# Altium PCB PCB_1192025.PcbDoc
Units mil, origin at the board's own origin, x right, y up, seen from the top; angles counter-clockwise.
Board outline 4125 x 3230 mil, 2 copper layers (Top Layer, Bottom Layer); 14 components, 21 nets, 83 pads, 0 vias.
Unrouted connection lines stored in the file: 4.
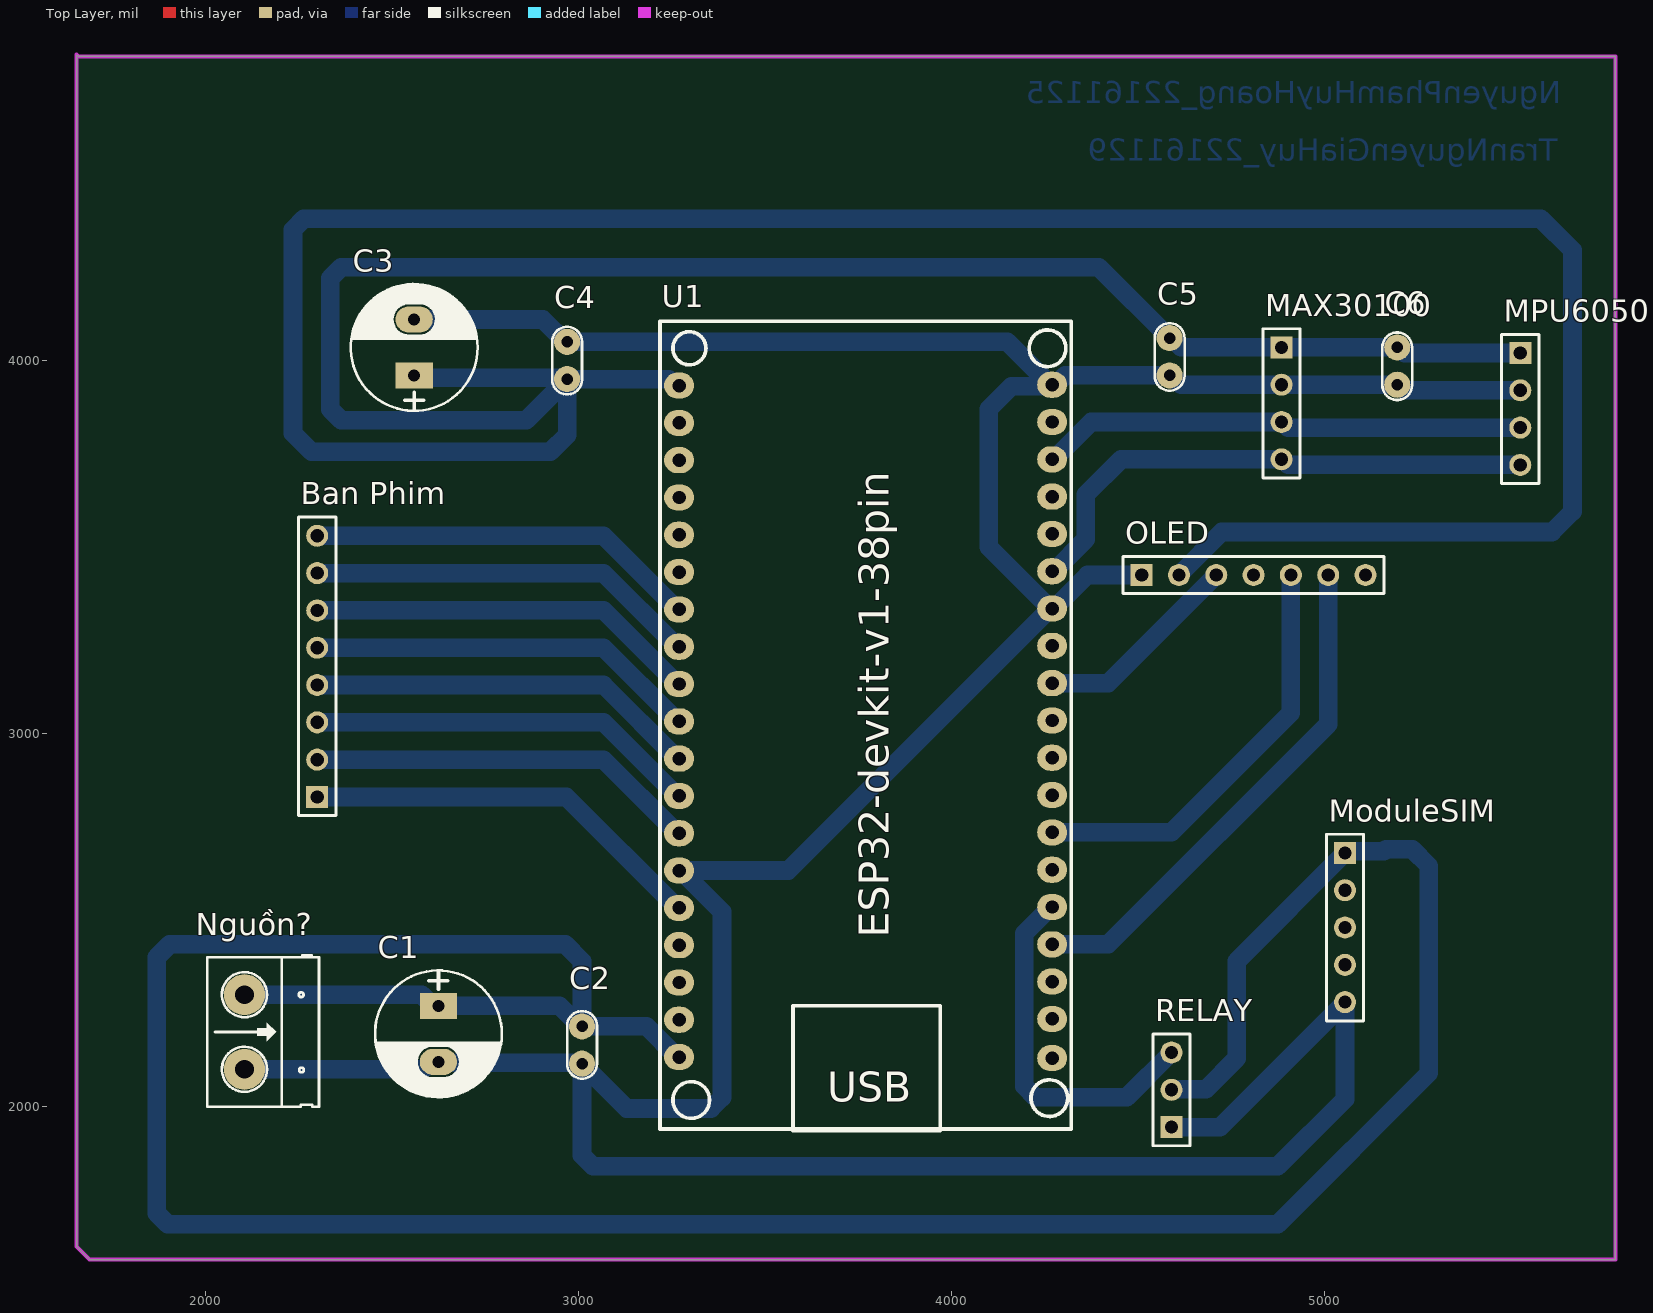
[diagram p0: Top Layer view]
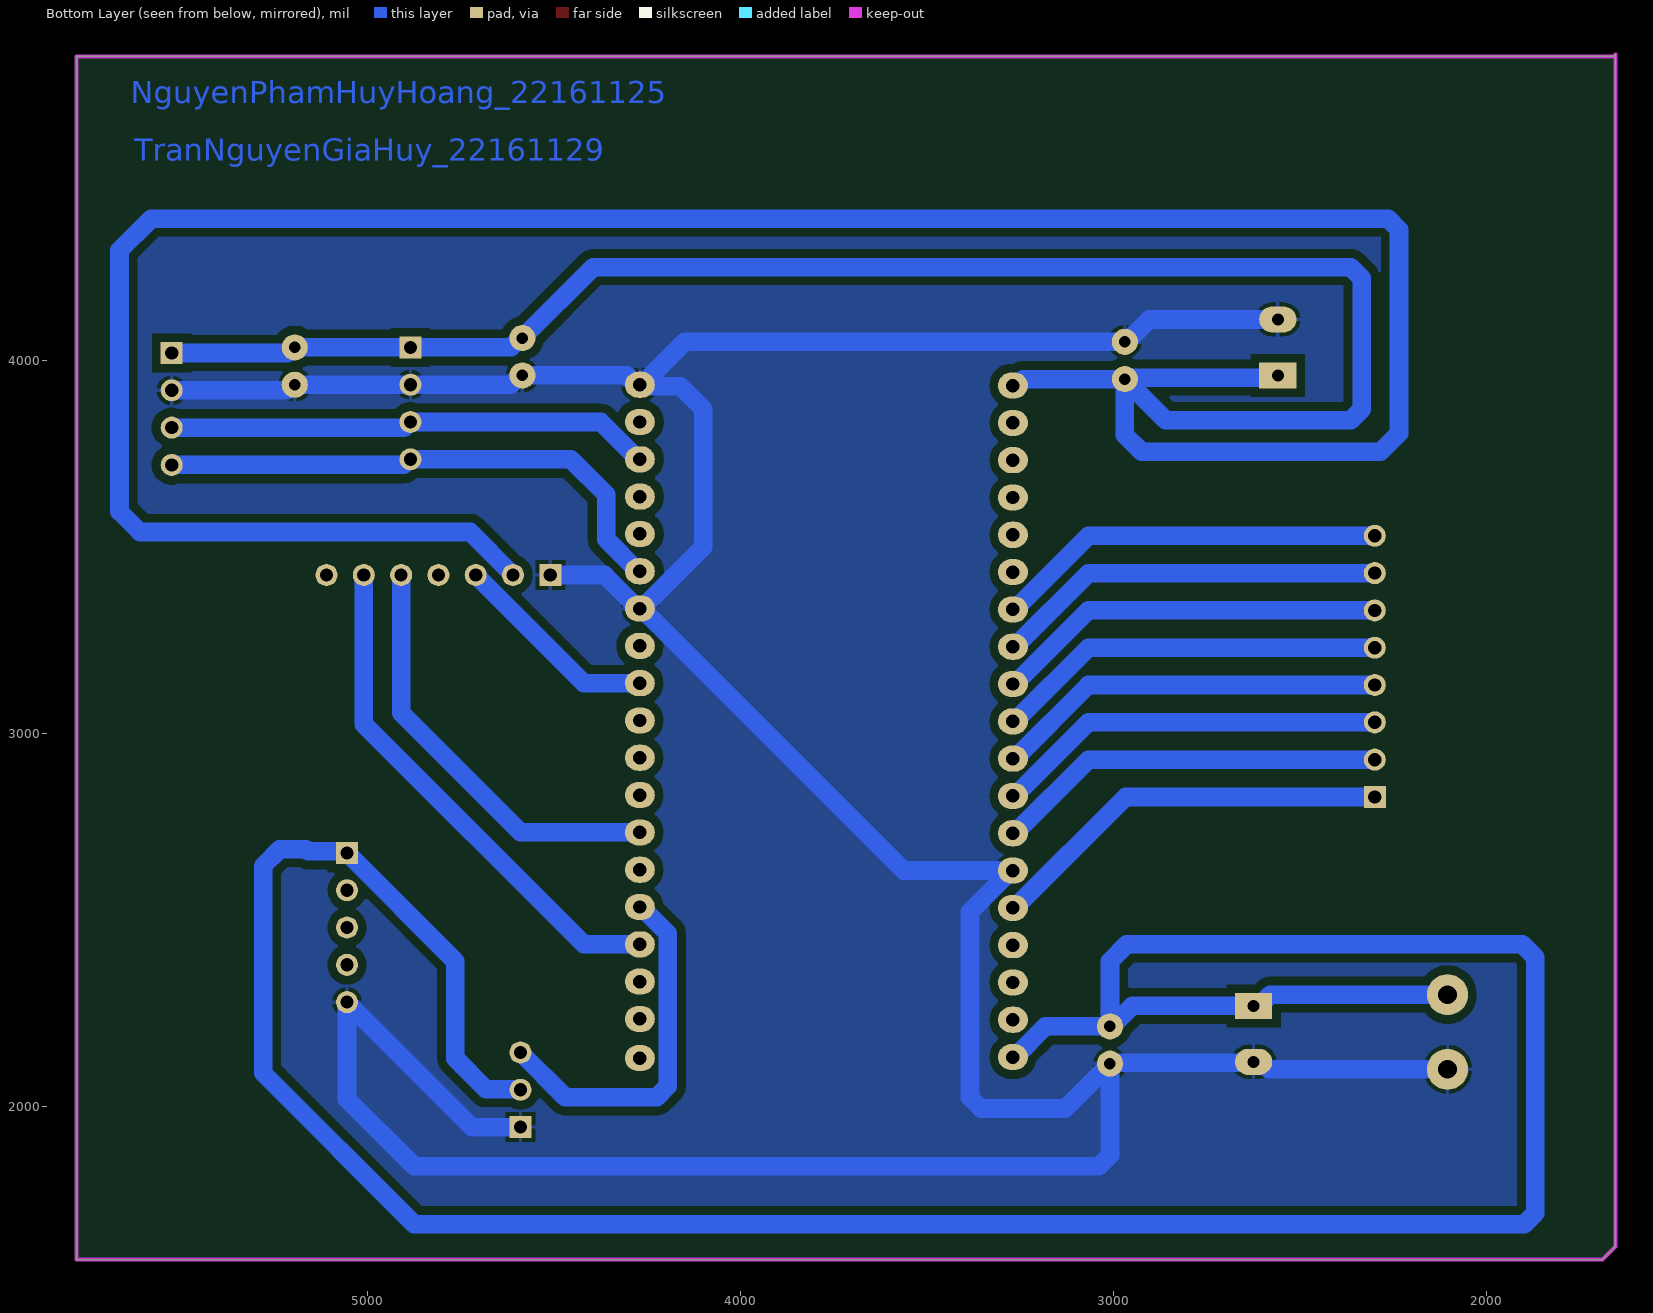
[diagram p1: Bottom Layer view, seen from below]
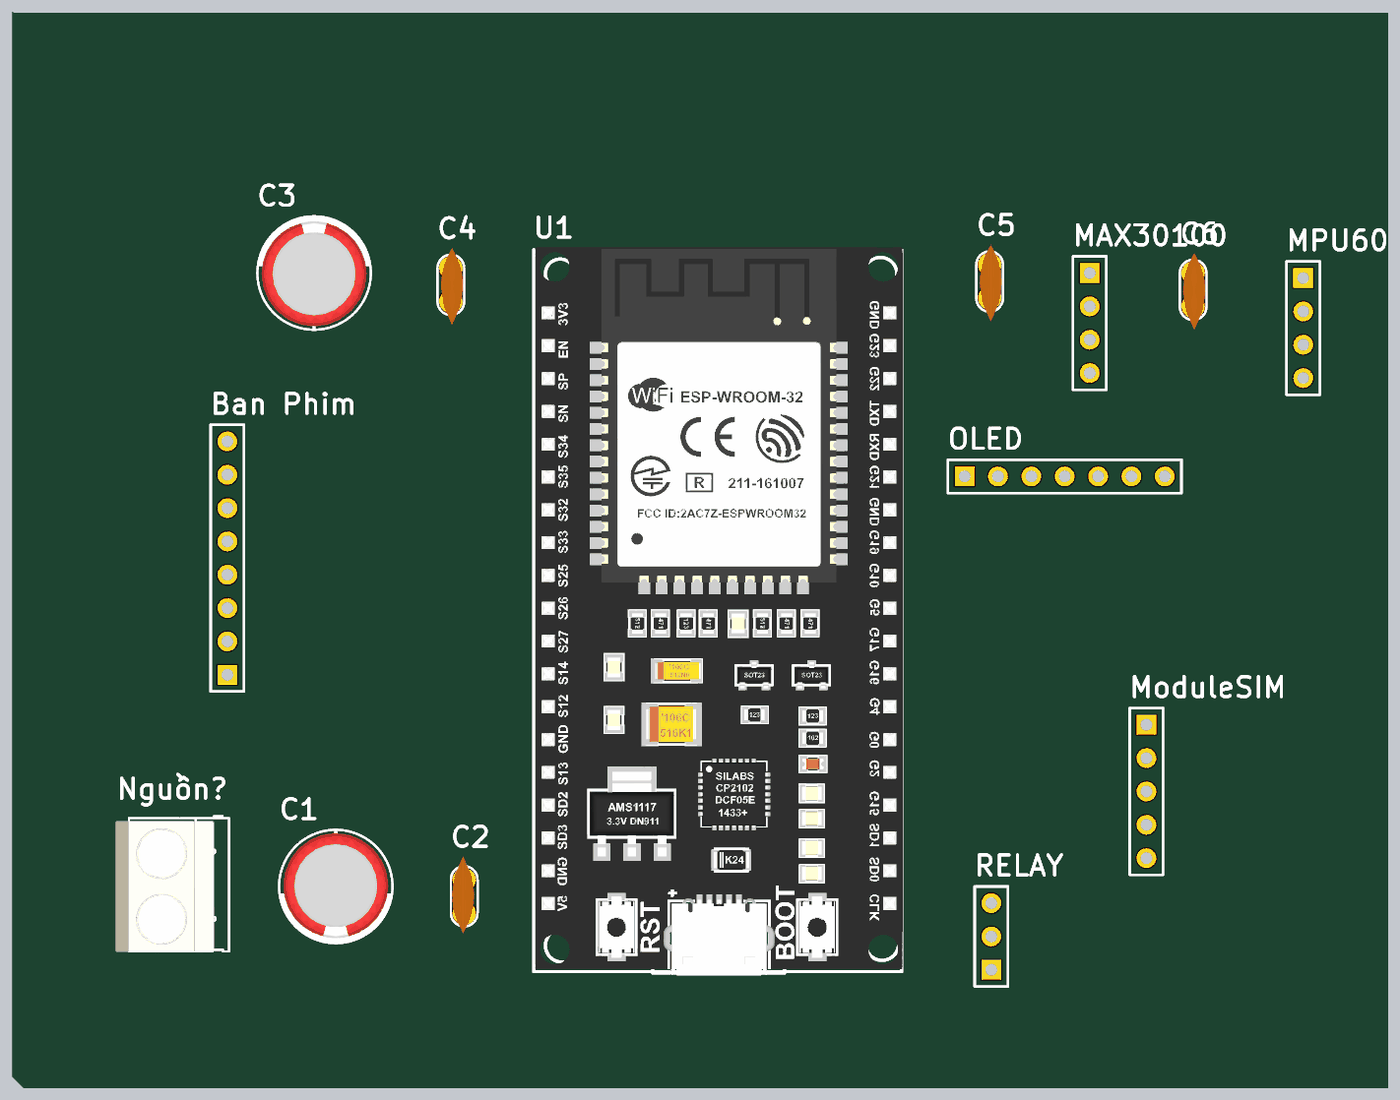
[diagram p2: 3D render of the assembled board from above, using the file's embedded part models]

## Layer stack, top to bottom
Top Solder: solder mask 0.4, Solder Resist, Dk 3.5
Top Layer: signal copper 1.4
Dielectric 1: dielectric 12.6, FR-4, Dk 4.8
Bottom Layer: signal copper 1.4
Bottom Solder: solder mask 0.4, Solder Resist, Dk 3.5

## Board outline
1655,1625 1690,1590 5780,1590 5780,4815 1660,4815 1655,4820

## Design rules (kind name [scope] priority, off if disabled: settings)
Clearance [All] p1: gap=23.62 ignorepadtopadclearanceinfootprint=FALSE
PolygonConnect [All] p1: connectstyle=Relief reliefconductorwidth=10 reliefentries=4 polygonreliefangle="90 Angle" airgapwidth=10
RoutingVias [All] p1: holewidth=28 width=50 viastyle="Through Hole" minholewidth=28 minwidth=50 maxholewidth=28 maxwidth=50
SolderMaskExpansion [All] p1: expansion=4 istentingtop=FALSE
Width [All] p1: maxlimit=100 minlimit=10 preferedwidth=50
30 further rules are at their usual default settings.

## Components (designator, comment, footprint, x,y, rotation, side; value= is the part's Value field where it differs from the comment)
"Ban Phim" "Header 8" HDR1X8 2300,2830 r90 top
C1 "100uF/25V" CP1.5/3.4 2625,2270 r270 top value=100uF/35V/50V
C2 "104" CN1 3010,2115 r90 top value=100pF
C3 "100uF/25V" CP1.5/3.4 2560,3960 r90 top value=100uF/35V/50V
C4 "104" CN1 2970,4050 r270 top value=100pF
C5 "104" CN1 4585,4060 r270 top value=100pF
C6 "104" CN1 5195,4035 r270 top value=100pF
MAX30100 "Header 4" HDR1X4 4885,4035 r270 top
ModuleSIM "Header 5" HDR1X5 5055,2680 r270 top
MPU6050 "Header 4" HDR1X4 5525,4020 r270 top
Nguồn? "Header 2" HED2 2105,2300 r270 top
OLED "Header 7" HDR1X7 4510,3425 r0 top
RELAY "Header 3" HDR1X3 4590,1945 r90 top
U1 "ESP32-DEVKI-V1.0-PIN38" ESP32-DEVKIT-V1.0-38PIN 3770,3020.09 r0 top

## Footprints (in the part's own frame and the unit in brackets; to place one, negate y for a bottom-side part, rotate by r counter-clockwise, add the part's x,y. Pads: shape width x height; smd on the part's side, far side on the other; paste and mask are expansions set on the pad)
CN1 [mil]
  round 70 hole 31: 1(0,0) 2(100,0)
  silkscreen extent -40,-40 141,40, body extent -60,-30 170,37, height 265
CP1.5/3.4 [mil] "Tu hoa 220->470uF,16V, 470uF/16V,25V"
  rect 70x100 hole 32: 1(0,0)
  oval 70x100 hole 32: 2(150,0)
  silkscreen extent -95,-170 245,170, body extent -85,-157 230,157, height 446
ESP32-DEVKIT-V1.0-38PIN [mil] "DEVKIT 38 PIN"
  oval 80x70 hole 36: 1(-500,912.59) 2(-500,812.59) 3(-500,712.59) 4(-500,612.59) 5(-500,512.59) 6(-500,412.59) 7(-500,312.59) 8(-500,212.59) 9(-500,112.59) 10(-500,12.59) 11(-500,-87.41) 12(-500,-187.41) 13(-500,-287.41) 14(-500,-387.41) 15(-500,-487.41) 16(-500,-587.41) 17(-500,-687.41) 18(-500,-787.41) 19(-500,-887.41) 20(500,-890.09) 21(500,-785.09) 22(500,-685.09) 23(500,-585.09) 24(500,-485.09) 25(500,-385.09) 26(500,-285.09) 27(500,-185.09) 28(500,-85.09) 29(500,14.91) 30(500,114.91) 31(500,214.91) 32(500,314.91) 33(500,414.91) 34(500,514.91) 35(500,614.91) 36(500,714.91) 37(500,814.91) 38(500,914.91)
  silkscreen extent -551,-1085 551,1085, body extent -547,-1092 555,1092, height 269
HDR1X3 [mm] "Connector; Header; 3 Position"
  rect 1.5x1.5 hole 0.9: 1(0,0)
  round 1.5 hole 0.9: 2(2.54,0) 3(5.08,0)
  silkscreen extent -1.27,-1.27 6.35,1.27, body extent -1.27,-1.27 6.35,1.27, height 7
HDR1X4 [mm] "Connector; Header; 4 Position"
  rect 1.5x1.5 hole 0.9: 1(0,0)
  round 1.5 hole 0.9: 2(2.54,0) 3(5.08,0) 4(7.62,0)
  silkscreen extent -1.27,-1.27 8.89,1.27, body extent -1.27,-1.27 8.89,1.27, height 7
HDR1X5 [mm] "Connector; Header; 5 Position"
  rect 1.5x1.5 hole 0.9: 1(0,0)
  round 1.5 hole 0.9: 2(2.54,0) 3(5.08,0) 4(7.62,0) 5(10.16,0)
  silkscreen extent -1.27,-1.27 11.43,1.27, body extent -1.27,-1.27 11.43,1.27, height 7
HDR1X7 [mm] "Connector; Header; 7 Position"
  rect 1.5x1.5 hole 0.9: 1(0,0)
  round 1.5 hole 0.9: 2(2.54,0) 3(5.08,0) 4(7.62,0) 5(10.16,0) 6(12.7,0) 7(15.24,0)
  silkscreen extent -1.27,-1.27 16.51,1.27, body extent -1.27,-1.27 16.51,1.27, height 7
HDR1X8 [mm] "Connector; Header; 8 Position"
  rect 1.5x1.5 hole 0.9: 1(0,0)
  round 1.5 hole 0.9: 2(2.54,0) 3(5.08,0) 4(7.62,0) 5(10.16,0) 6(12.7,0) 7(15.24,0) 8(17.78,0)
  silkscreen extent -1.27,-1.27 19.05,1.27, body extent -1.27,-1.27 19.05,1.27, height 7
HED2 [mil] "Header 2, 2 pin, hight 300mil, Pin to Pin 200, Colour Green"
  round 110 hole 50: 1(0,0) 2(200,0)
  silkscreen extent -106,-100 300,200, body extent -92,-140 302,155, height 394

## Part data
"Ban Phim": "Header, 8-Pin", LatestRevisionDate=17-Jul-2002, LatestRevisionNote="Re-released for DXP Platform.", Publisher="Altium Limited"
C1 C3: library part CP3, "Cap 100uF/35V - 470uF/16V", Description 1="1000uF/6,3V - 470uF/16V - 330uF - 25V", Description 2="220uF/35V - 100uF/50V - 63V - 4,7uF/200V", Description 3="22uF => 33uF100V - 3,3uF => 4,7uF/250V", Description 4="2,2uF =>3,3uF/350 - 2,2uF/400V - 1uF/450V"
C2 C4 C5 C6: library part CN1, "Cap np  1pF - 472pF"
MAX30100 MPU6050: "Header, 4-Pin", LatestRevisionDate=17-Jul-2002, LatestRevisionNote="Re-released for DXP Platform.", Publisher="Altium Limited"
ModuleSIM: "Header, 5-Pin", LatestRevisionDate=17-Jul-2002, LatestRevisionNote="Re-released for DXP Platform.", Publisher="Altium Limited"
Nguồn?: library part Hed2, "Header 2 (Green)"
OLED: "Header, 7-Pin", LatestRevisionDate=17-Jul-2002, LatestRevisionNote="Re-released for DXP Platform.", Publisher="Altium Limited"
RELAY: "Header, 3-Pin", LatestRevisionDate=17-Jul-2002, LatestRevisionNote="Re-released for DXP Platform.", Publisher="Altium Limited"

## Nets (pads, with @x,y where several pads share a name; then routed paths per layer and width w, separated by ;. In a path a pad name is that pad's centre, name@x,y a point inside that pad or via, vN(x,y) a via of type N, cw(c..) or ccw(c..) an arc to the next point about the centre after c; other vN are vias at no path point)
3.3V: C3.1 C4.2 C5.1 C6.1 MAX30100.1 MPU6050.1 OLED.2 U1.1 | length 11835.7
  Bottom Layer w50: C3.1 2566.17,3953.83 2966.17,3953.83 C4.2 ; U1.1 3259.59,3932.68 3242.26,3950 C4.2 ; OLED.2 4725,3540 5610,3540 5665,3595 5665,4295 5580,4380 2264.29,4380 2235,4350.71 2235,3805 2285,3755 2925,3755 2970,3800 C4.2 ; MPU6050.1 5215.41,4020 5200.41,4035 C6.1 MAX30100.1 4615.41,4035 4590.41,4060 C5.1 4395,4250 2364.29,4250 2335,4220.71 2335,3869.29 2364.29,3840 2860,3840 C4.2
+5V: C1.1 C2.2 ModuleSIM.1 Nguồn?.1 RELAY.2 U1.19 | length 8541.6
  Bottom Layer w50: Nguồn?.1 2580,2300 2610,2270 C1.1 2949.59,2270 3004.59,2215 C2.2 ; U1.19 3265,2132.68 3182.68,2215 C2.2 ; RELAY.2 4591.73,2046.73 4682.44,2046.73 4765,2129.29 4765,2390 ModuleSIM.1 5059.53,2684.53 5159.53,2684.53 5165,2690 5235,2690 5280,2645 5280,2090 4875,1685 1899.29,1685 1870,1714.29 1870,2400 1905,2435 2965,2435 3010,2390 C2.2
CLK: OLED.3 U1.30 | length 560.1
  Bottom Layer w50: U1.30 4420,3135 OLED.3
CS: OLED.7 U1.29
DC: OLED.6 U1.23 | length 1384.4
  Bottom Layer w50: U1.23 4420,2435 5010,3025 OLED.6
GND: C1.2 C2.1 C3.2 C4.1 C5.2 C6.2 MAX30100.2 ModuleSIM.5 MPU6050.2 Nguồn?.2 OLED.1 RELAY.1 U1.14 U1.32 U1.38 | length 10680.2
  Bottom Layer w50: Nguồn?.2 2584.59,2100 2604.59,2120 C1.2 2627.5,2117.5 3007.5,2117.5 C2.1 ; C3.2 2904.59,4110 2964.59,4050 C4.1 4150,4050 4265,3935 U1.38 ; U1.14 U1.14@3275,2632.68 ; OLED.1 4365,3425 4275,3335 U1.32 U1.32@4265,3335 ; RELAY.1 4720,1945 ModuleSIM.5 5055,2020 4875,1840 3039.29,1840 3010,1869.29 C2.1 ; MPU6050.2 5215.41,3920 5200.41,3935 C6.2 MAX30100.2 4615.41,3935 4590.41,3960 C5.2 4305.41,3960 4280.41,3935 U1.38 ; C2.1 3130,1995 3355.71,1995 3385,2024.29 3385,2522.68 U1.14@3275,2632.68 ; U1.14@3275,2632.68 3562.68,2632.68 U1.32@4265,3335 ; U1.32@4265,3335 4100,3500 4100,3870 4161.17,3931.17 4266.17,3931.17 U1.38
MOSI: OLED.4 U1.37
"NetBan Phim_1": "Ban Phim.1" U1.15 | length 1093.2
  Bottom Layer w50: 2300,2830 2967.68,2830 3265,2532.68 U1.15
"NetBan Phim_2": "Ban Phim.2" U1.13 | length 1051.7
  Bottom Layer w50: 2300,2930 3067.68,2930 3265,2732.68 U1.13
"NetBan Phim_3": "Ban Phim.3" U1.12 | length 1051.7
  Bottom Layer w50: 2300,3030 3067.68,3030 3265,2832.68 U1.12
"NetBan Phim_4": "Ban Phim.4" U1.11 | length 1051.7
  Bottom Layer w50: 2300,3130 3067.68,3130 3265,2932.68 U1.11
"NetBan Phim_5": "Ban Phim.5" U1.10 | length 1051.7
  Bottom Layer w50: 2300,3230 3067.68,3230 3265,3032.68 U1.10
"NetBan Phim_6": "Ban Phim.6" U1.9 | length 1051.7
  Bottom Layer w50: 2300,3330 3067.68,3330 3265,3132.68 U1.9
"NetBan Phim_7": "Ban Phim.7" U1.8 | length 1051.7
  Bottom Layer w50: 2300,3430 3067.68,3430 3265,3232.68 U1.8
"NetBan Phim_8": "Ban Phim.8" U1.7 | length 1051.7
  Bottom Layer w50: 2300,3530 3067.68,3530 3265,3332.68 U1.7
NetModuleSIM_3: ModuleSIM.3 U1.28
NetModuleSIM_4: ModuleSIM.4 U1.27
RELAY: RELAY.3 U1.24 | length 970.5
  Bottom Layer w50: U1.24 4266.01,2535 4195,2463.99 4195,2055 4225,2025 4470,2025 RELAY.3
RES: OLED.5 U1.26 | length 1142.5
  Bottom Layer w50: U1.26 4590,2735 4910,3055 OLED.5
SCL: MAX30100.3 MPU6050.3 U1.36 | length 1302.6
  Bottom Layer w50: U1.36 4275,3735 4375,3835 MAX30100.3 4887.45,3835 4902.45,3820 MPU6050.3
SDA: MAX30100.4 MPU6050.4 U1.33 | length 1455.8
  Bottom Layer w50: U1.33 4275,3435 4360.52,3520.52 4360.52,3640.52 4455,3735 MAX30100.4 4887.45,3735 4902.45,3720 MPU6050.4
pads on no net: ModuleSIM.2 U1.2 U1.3 U1.4 U1.5 U1.6 U1.16 U1.17 U1.18 U1.20 U1.21 U1.22 U1.25 U1.31 U1.34 U1.35

## Polygon pours and split planes (outlines as drawn)
GND on Bottom Layer "GND_L02_P000" (solid, remove dead copper, pour order 0): 5775,1590 1690,1590 1655,1625 1655,4815 5780,4815

## Keep-outs
Keep-Out Layer:
  the board outline again, w10

## Other copper
Bottom Layer:
  text "NguyenPhamHuyHoang_22161125" at 5635,4689.99 h60
  text "TranNguyenGiaHuy_22161129" at 5625,4534.99 h60

## Text inside footprints (layer, text, board x,y; h text height)
U1: Top Overlay "USB" at 3667.64,2012.67 h80; Top Overlay "ESP32-devkit-v1-38pin" at 3832.64,2452.67 h80 r90